# Altium PCB PCB1.PcbDoc (part 1 of 2)
Units mil, origin at the board's own origin, x right, y up, seen from the top; angles counter-clockwise.
Board outline 2900 x 2900 mil, 4 copper layers (Top Layer, Inner Layer, GND, Bottom Layer), stack 23.756 mil thick; 59 components, 117 nets, 456 pads, 163 vias.
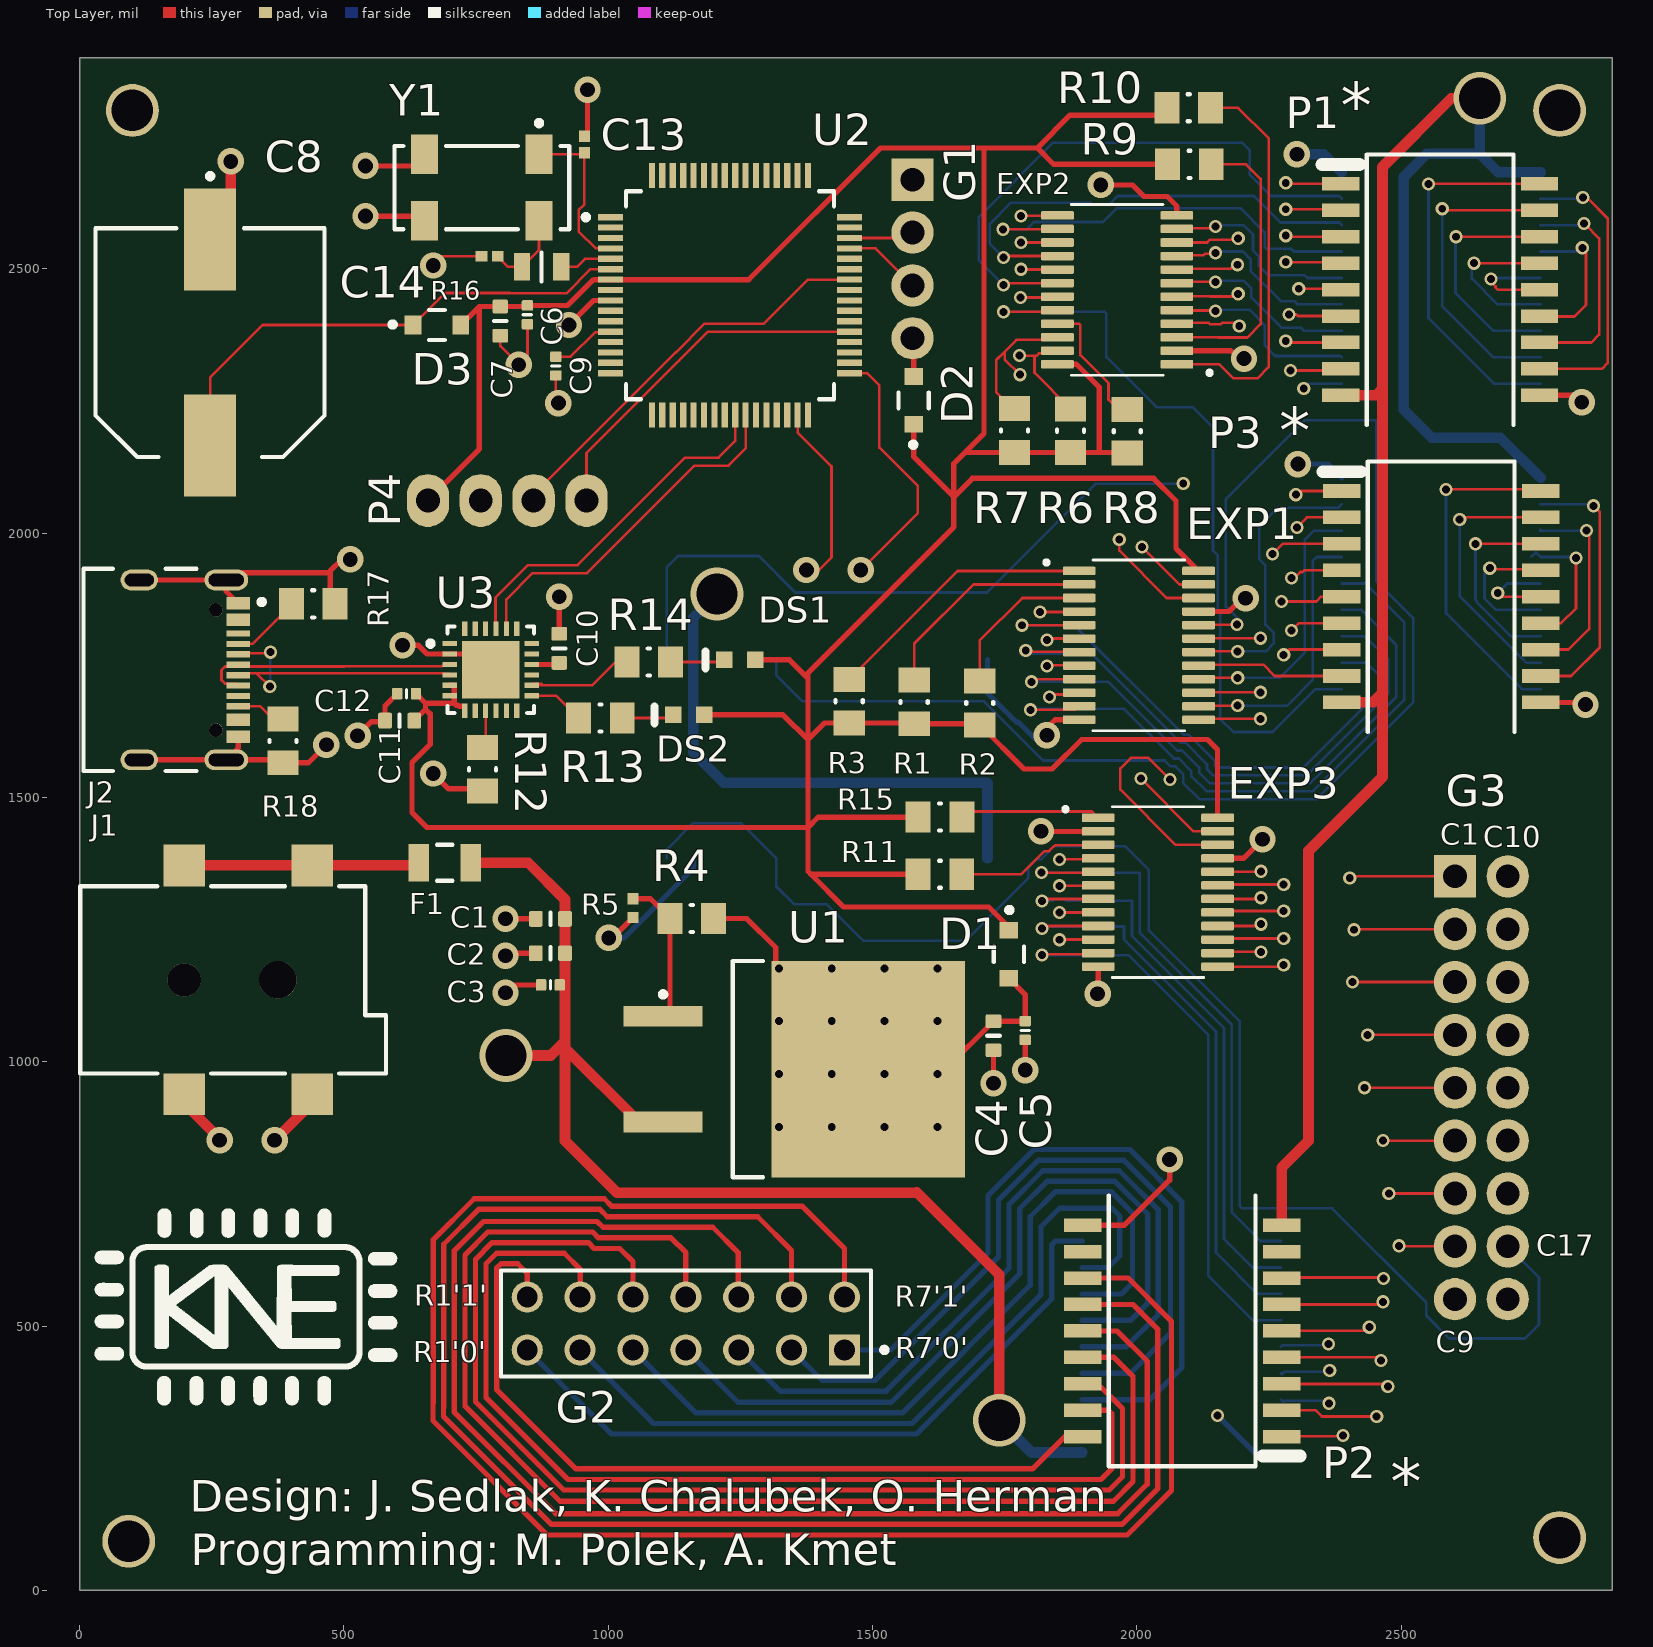
[diagram p0: Top Layer view]
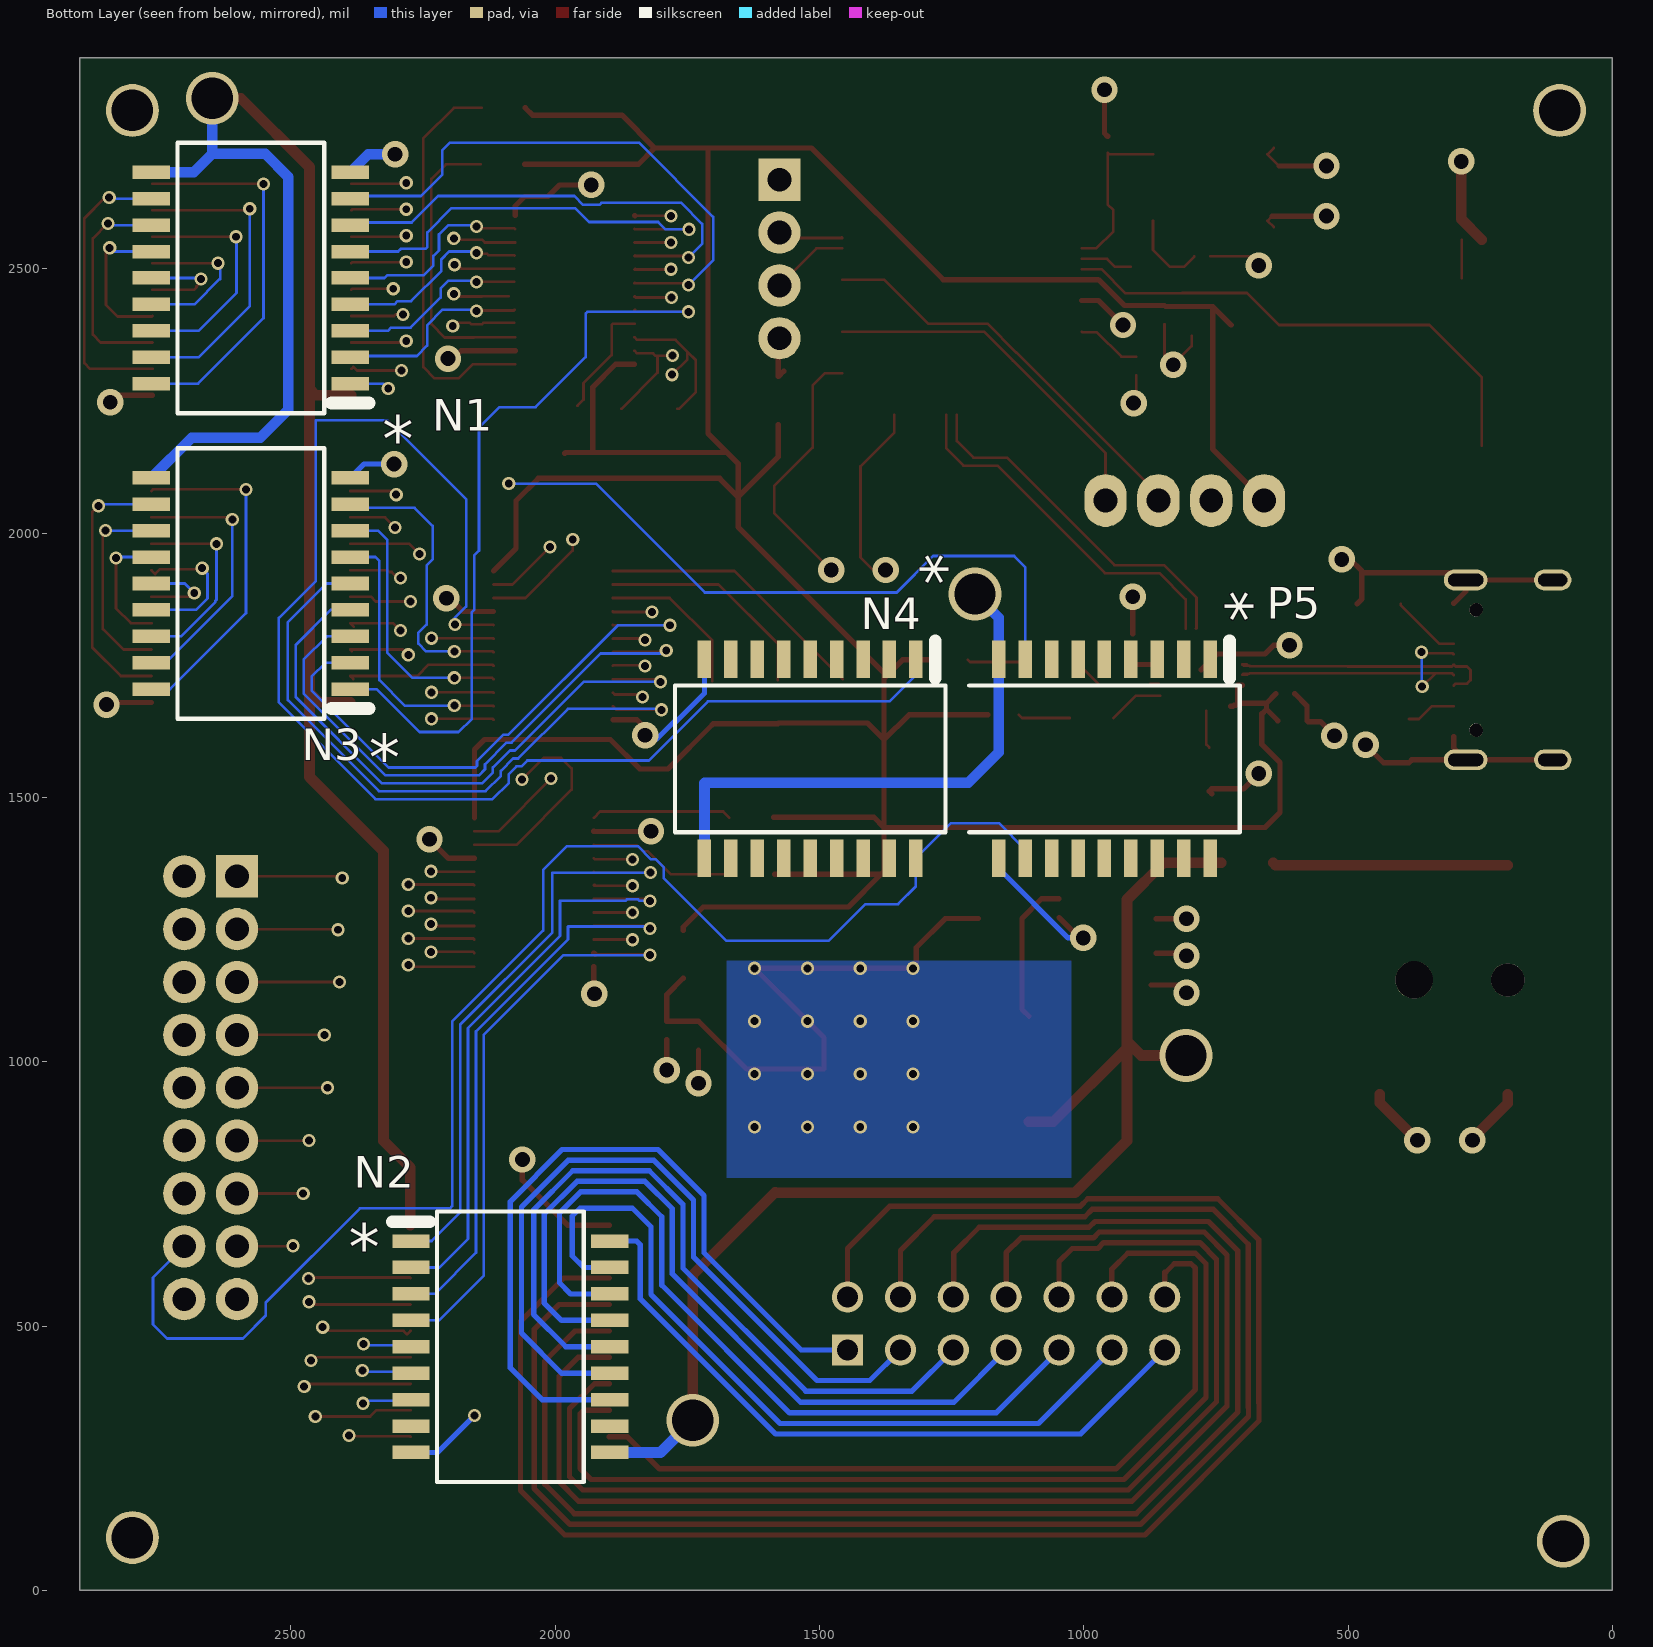
[diagram p1: Bottom Layer view, seen from below]
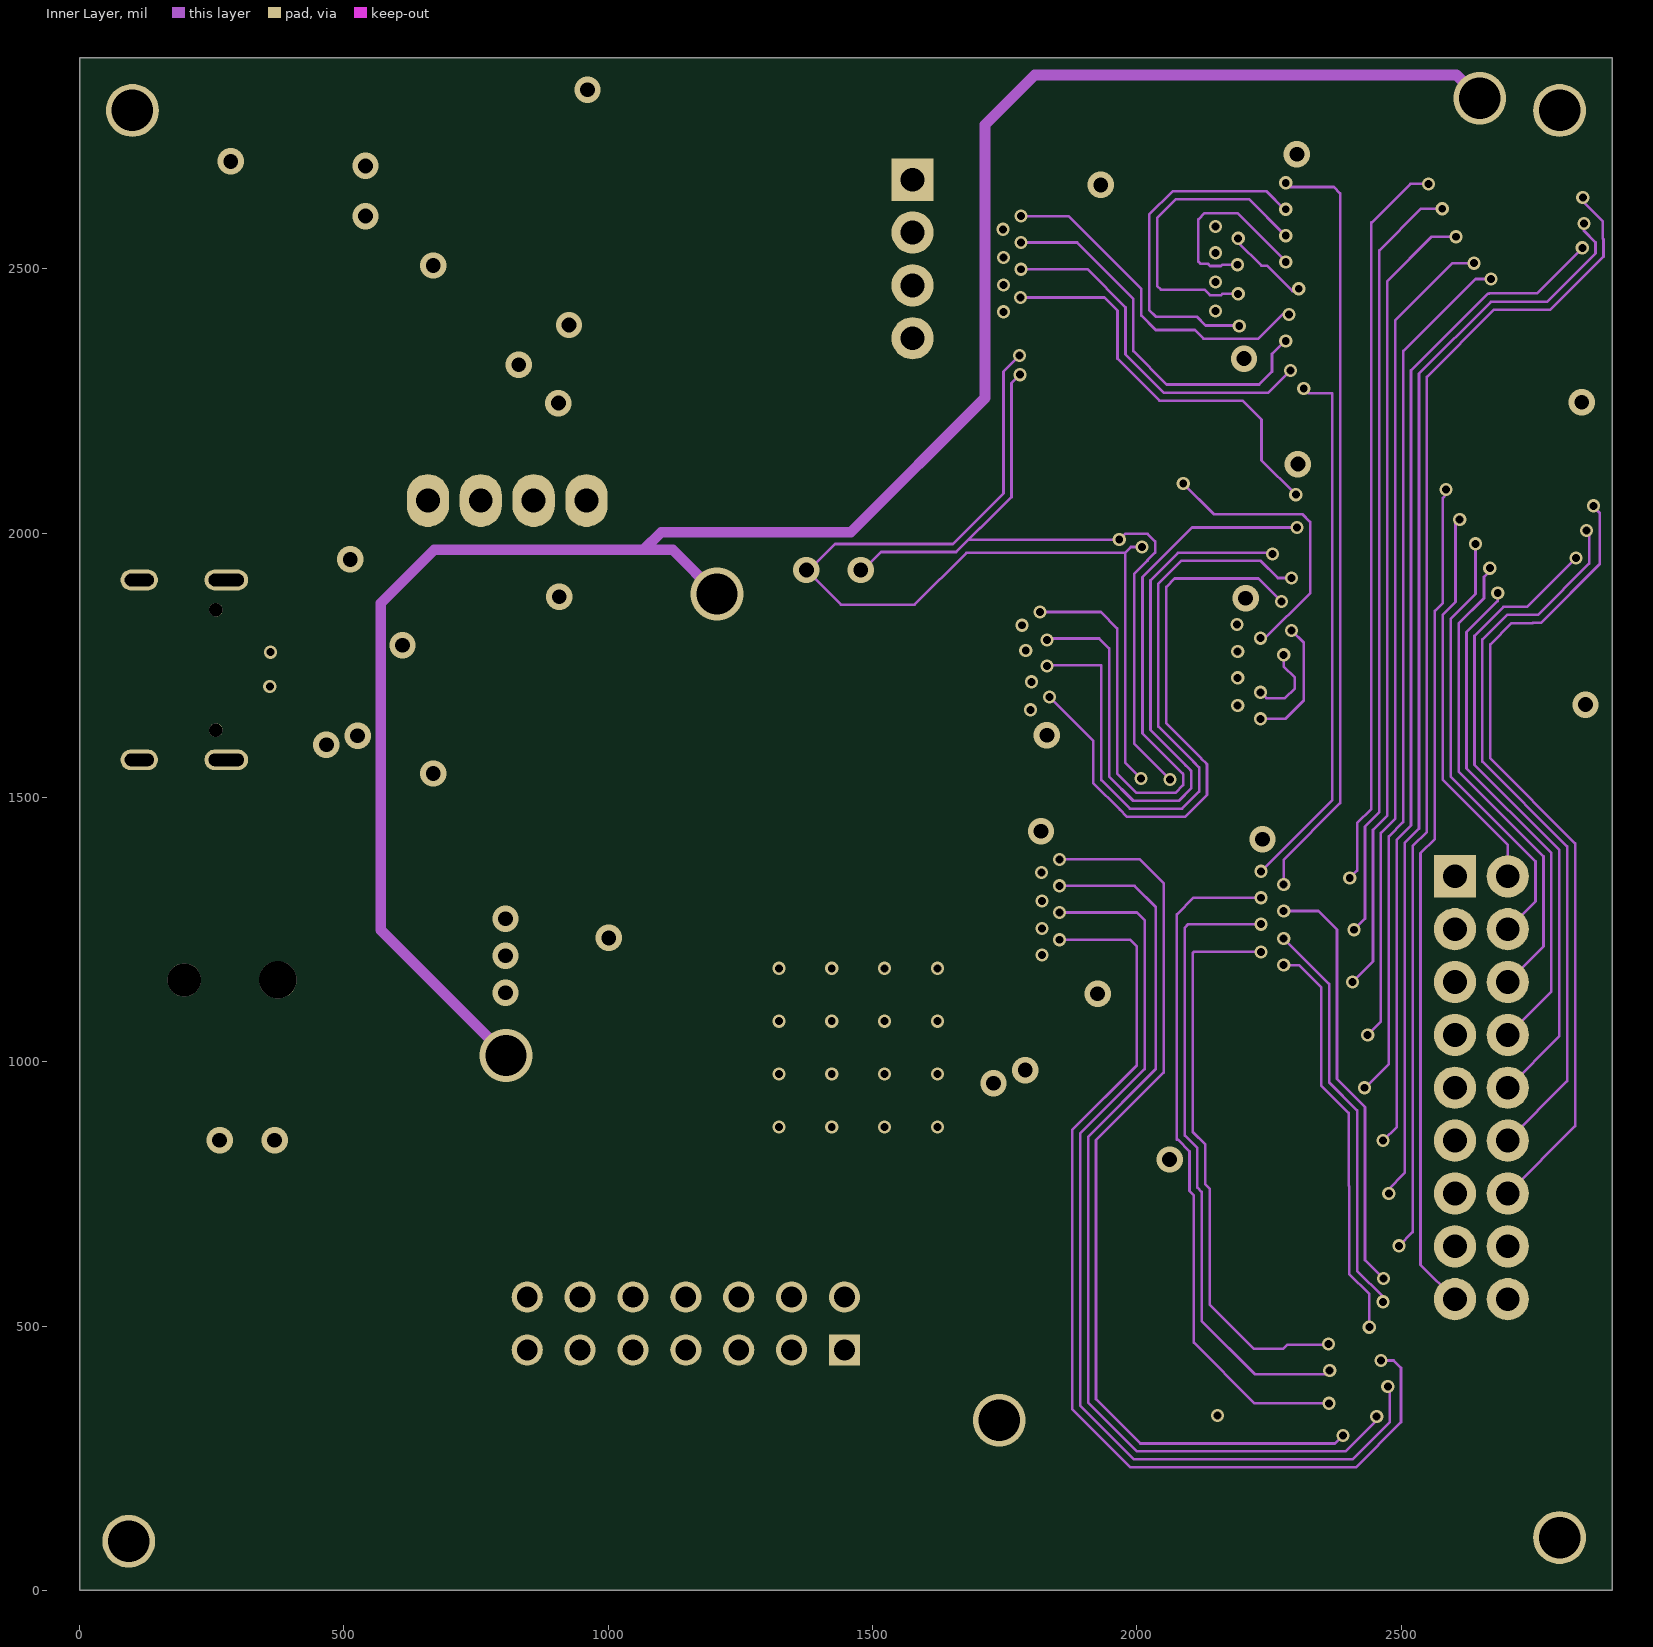
[diagram p2: Inner Layer]
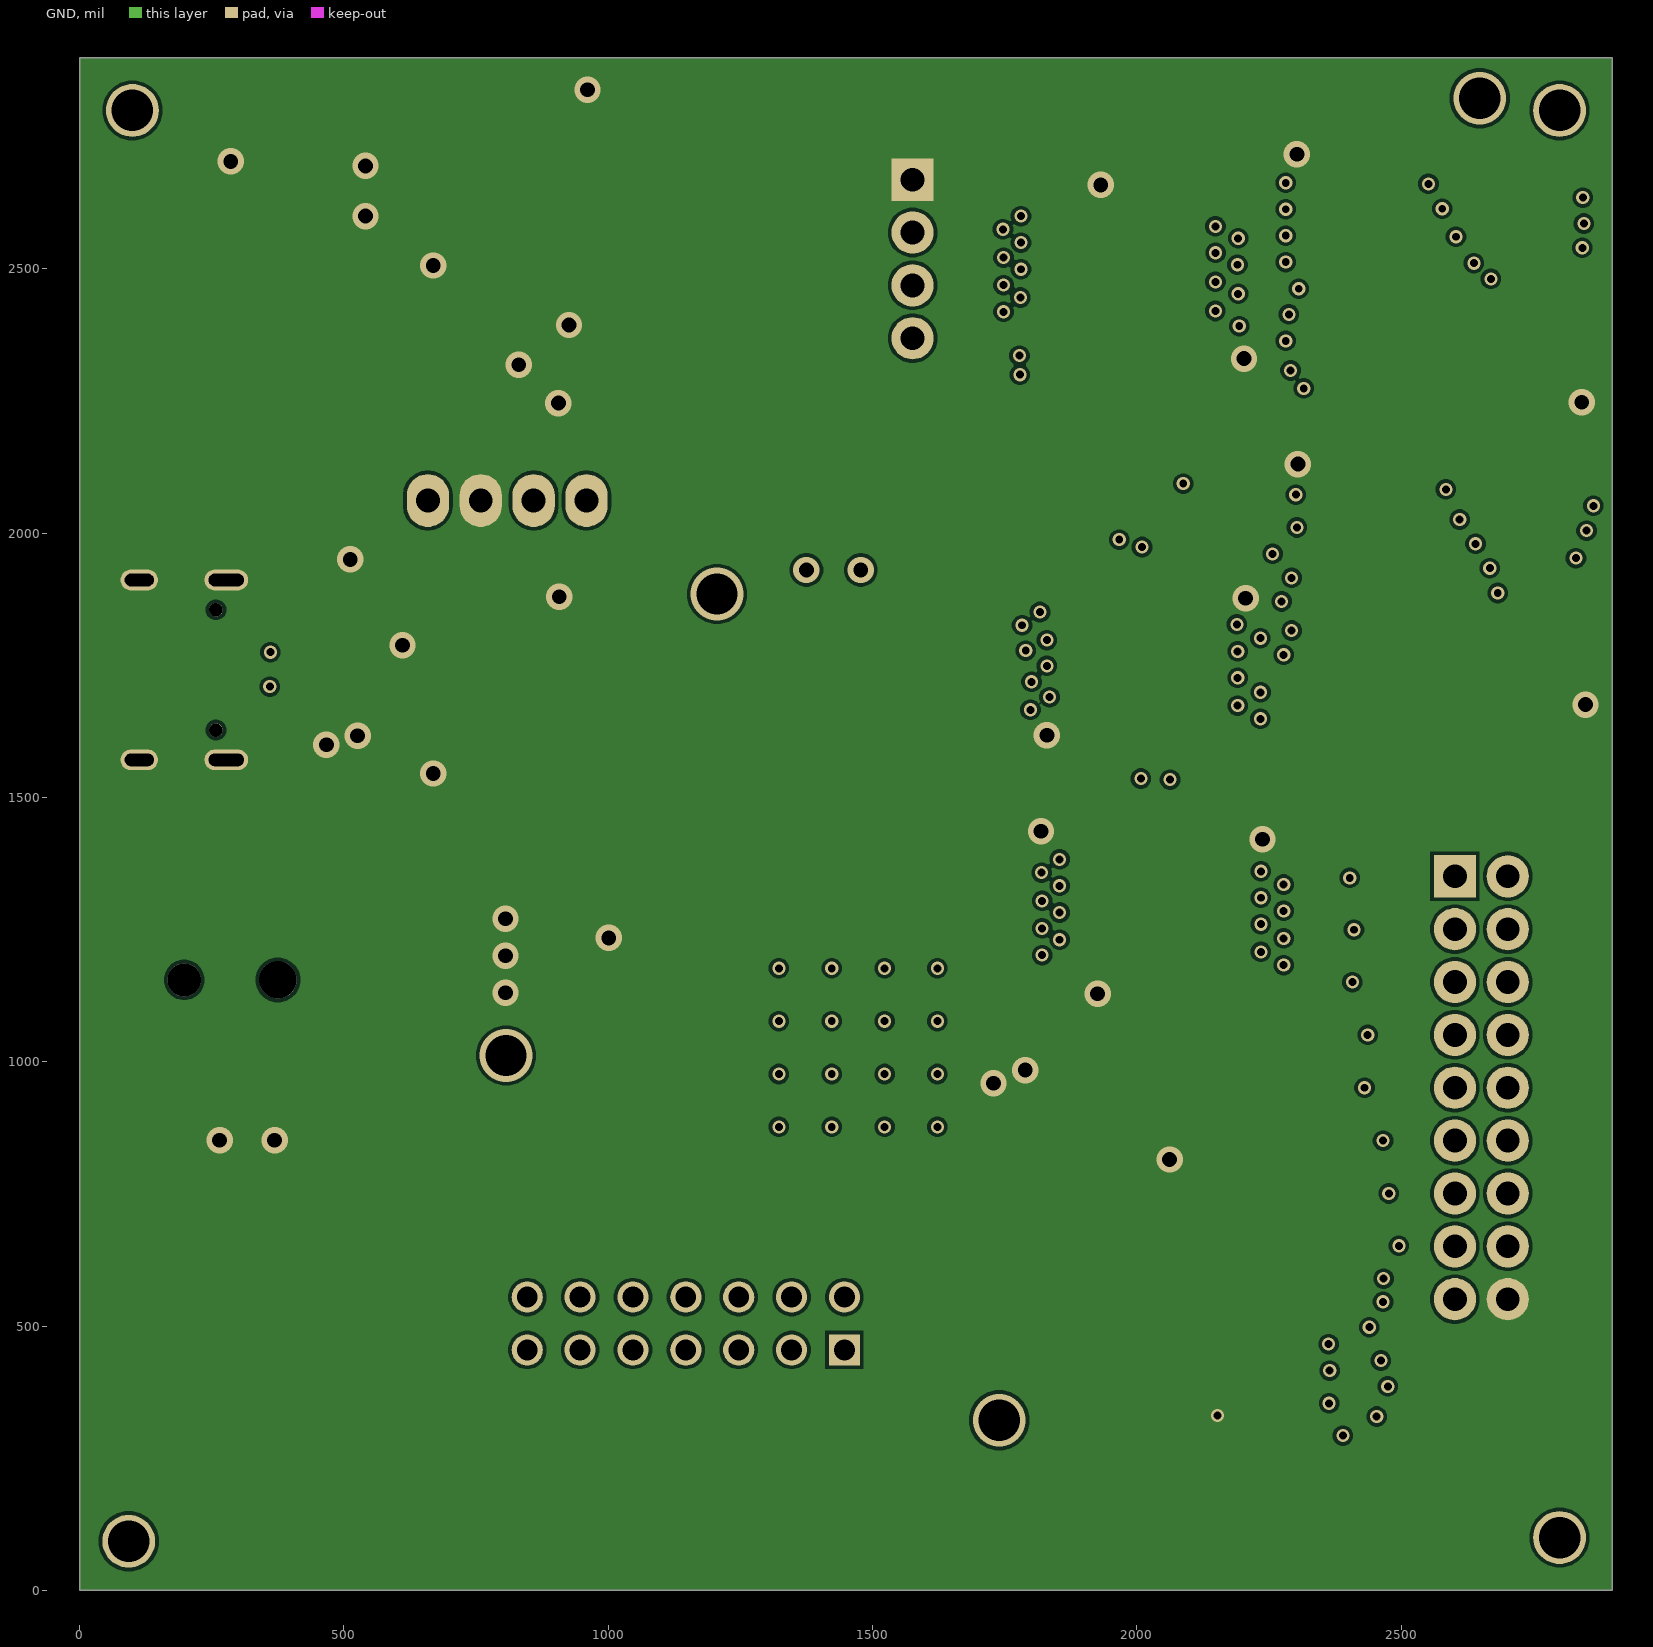
[diagram p3: GND]
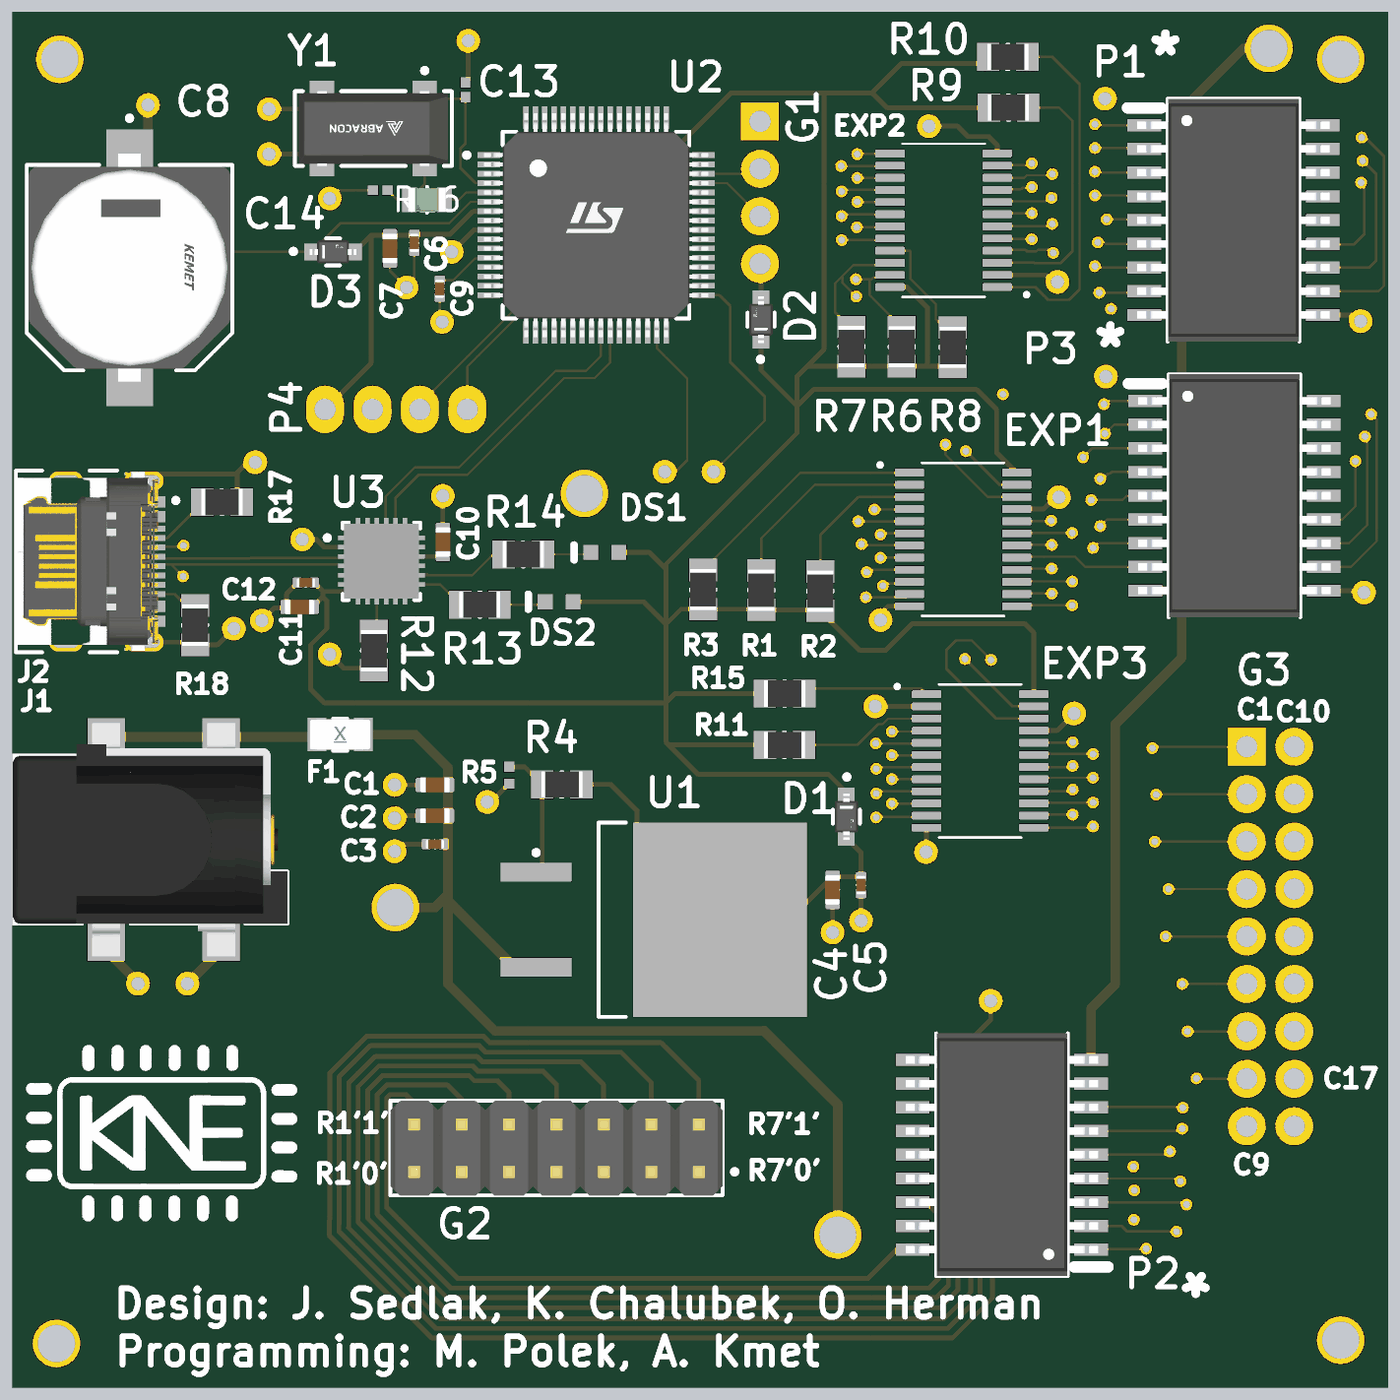
[diagram p5: 3D render of the assembled board from above, using the file's embedded part models]
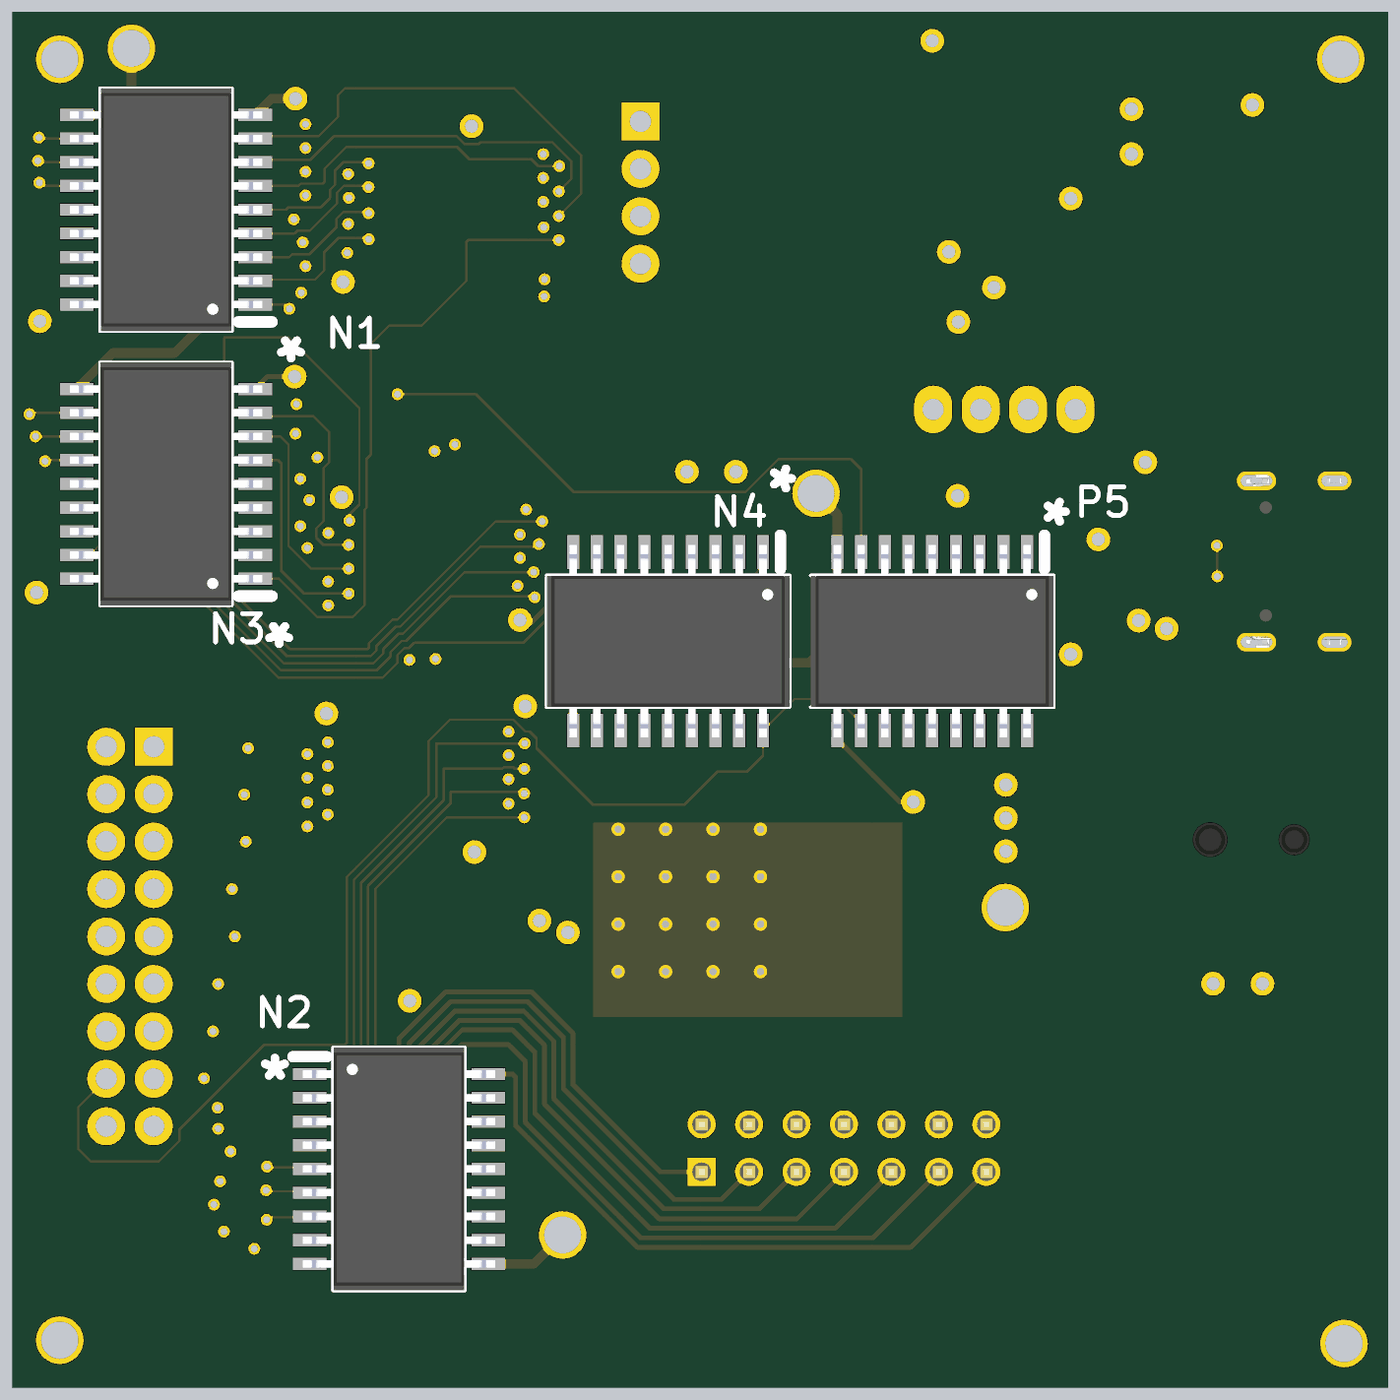
[diagram p6: 3D render of the assembled board from below, using the file's embedded part models]

## Layer stack, top to bottom
Top Solder: solder mask 0.4, Solder Resist, Dk 3.5
Top Layer: signal copper 1.4
Dielectric 2: prepreg 2.8, PP-006, Dk 4.1
Inner Layer: signal copper 1.378
Dielectric 1: dielectric 12.6, FR-4, Dk 4.8
GND: signal copper 1.378
Dielectric 3: prepreg 2.8, PP-006, Dk 4.1
Bottom Layer: signal copper 1.4
Bottom Solder: solder mask 0.4, Solder Resist, Dk 3.5

## Board outline
0,0 2900,0 2900,2900 0,2900

## Design rules (kind name [scope] priority, off if disabled: settings)
AssemblyTestPointUsage [All] p1: isadvanced=TRUE
AssemblyTestpoint [All] p1: isadvanced=TRUE testpointundercomponent=TRUE minsize=40 maxsize=100 preferedsize=60 minholesize=0 maxholesize=40 preferedholesize=32 testpointgrid=1 usegrid=TRUE gridtolerance=0.01 allowsidetop=TRUE allowsidebottom=TRUE
Clearance Clearance_1 [(ExistsOnLayer('Inner Layer') Or ExistsOnLayer('GND')) vs (ExistsOnLayer('Inner Layer') Or ExistsOnLayer('GND'))] p1: gap=6.5 ignorepadtopadclearanceinfootprint=FALSE sourcerule=40 cellrowname=All cellrowtype=0 cellcolname=All cellcoltype=0 innerlayers=TRUE
Clearance Clearance_2 [(ExistsOnLayer('Top Layer') Or ExistsOnLayer('Bottom Layer')) vs (ExistsOnLayer('Top Layer') Or ExistsOnLayer('Bottom Layer'))] p2: gap=6.5 ignorepadtopadclearanceinfootprint=FALSE sourcerule=40 cellrowname=All cellrowtype=0 cellcolname=All cellcoltype=0 outerlayers=TRUE
Clearance [All] p3: gap=10 ignorepadtopadclearanceinfootprint=FALSE ismatrix=TRUE
ComponentClearance [All] p1: isadvanced=TRUE gap=10 collisioncheckmode=3 verticalgap=10 showdistances=FALSE
DiffPairsRouting DifferentialPairsRouting_1 [InDifferentialPair('D_D')] p1: maxlimit=10 minlimit=8 mostfreqgap=8 toplayer_minwidth=5 toplayer_maxwidth=15 toplayer_prefwidth=5 midlayer1_minwidth=5 midlayer1_maxwidth=15 midlayer1_prefwidth=5 midlayer2_minwidth=5 midlayer2_maxwidth=15 midlayer2_prefwidth=5 bottomlayer_minwidth=5 bottomlayer_maxwidth=15 bottomlayer_prefwidth=5 maxuncoupledlength=500
DiffPairsRouting [All] p2: maxlimit=10 minlimit=10 mostfreqgap=10 toplayer_minwidth=15 toplayer_maxwidth=15 toplayer_prefwidth=15 midlayer1_minwidth=15 midlayer1_maxwidth=15 midlayer1_prefwidth=15 midlayer2_minwidth=15 midlayer2_maxwidth=15 midlayer2_prefwidth=15 bottomlayer_minwidth=15 bottomlayer_maxwidth=15 bottomlayer_prefwidth=15 maxuncoupledlength=500
FabricationTestPointUsage [All] p1: isadvanced=TRUE valid=0 allowmultiple=FALSE
FabricationTestpoint [All] p1: isadvanced=TRUE side=3 testpointundercomponent=TRUE minsize=40 maxsize=100 preferedsize=60 minholesize=0 maxholesize=40 preferedholesize=32 testpointgrid=1 allowsidetop=TRUE allowsidebottom=TRUE usegrid=TRUE gridtolerance=0.01
FanoutControl Fanout_BGA [IsBGA] p1: isadvanced=TRUE bgadir=Out bgaviamode=Centered fanoutstyle=Auto fanoutdirection=Alternating viagrid=1 // Fanout_BGA (Default Rule)
FanoutControl Fanout_LCC [IsLCC] p2: isadvanced=TRUE bgadir=Out bgaviamode=Centered fanoutstyle=Auto fanoutdirection=Alternating viagrid=1 // Fanout_LCC (Default Rule)
FanoutControl Fanout_SOIC [IsSOIC] p3: isadvanced=TRUE bgadir=Out bgaviamode=Centered fanoutstyle=Auto fanoutdirection=Alternating viagrid=1 // Fanout_SOIC (Default Rule)
FanoutControl Fanout_Small [(CompPinCount < 5)] p4: isadvanced=TRUE bgadir=Out bgaviamode=Centered fanoutstyle=Auto fanoutdirection=OutThenIn viagrid=1 // Fanout_Small (Default Rule)
FanoutControl Fanout_Default [All] p5: isadvanced=TRUE bgadir=Out bgaviamode=Centered fanoutstyle=Auto fanoutdirection=Alternating viagrid=1 // Fanout_Default (Default Rule)
Height [All] p1: isadvanced=TRUE minheight=0 maxheight=1000 prefheight=500
HoleSize [All] p1: isadvanced=TRUE absolutevalues=TRUE maxlimit=248.03 minlimit=5.91 maxpercent=80.000 minpercent=20.000
HoleToHoleClearance [All] p1: isadvanced=TRUE gap=17.72 allowstackedmicrovias=TRUE
LayerPairs [All] p1: isadvanced=TRUE enforce=TRUE
MaxMinImpedance MaxMinImpedance_1 [InDifferentialPair('D_D')] p1: minimum=85.00 maximum=95.00
MinimumSolderMaskSliver [All] p1: isadvanced=TRUE minsoldermaskwidth=3.94
NetAntennae [All] p1: isadvanced=TRUE netantennaetolerance=0
PasteMaskExpansion [All] p1: isadvanced=TRUE expansion=0
PlaneClearance [All] p1: isadvanced=TRUE clearance=20
PlaneConnect [All] p1: isadvanced=TRUE planeconnectstyle=Relief reliefexpansion=20 reliefentries=4 reliefconductorwidth=10 reliefairgap=10
PolygonConnect Direct [All] p1: isadvanced=TRUE connectstyle=Direct reliefconductorwidth=10 reliefentries=2 polygonreliefangle="0 Angle" airgapwidth=10
PolygonConnect PolygonConnectStyle_1 [InNet('RegOut')] p2: connectstyle=Direct reliefconductorwidth=10 reliefentries=4 polygonreliefangle="90 Angle" airgapwidth=10
PolygonConnect [All] p3: connectstyle=Relief reliefconductorwidth=10 reliefentries=4 polygonreliefangle="90 Angle" airgapwidth=10
RoutingCorners [All] p1: isadvanced=TRUE cornerstyle=45-Degree minsetback=100 maxsetback=100
RoutingPriority [All] p1: isadvanced=TRUE routingpriority=0
RoutingVias [All] p1: holewidth=28 width=50 viastyle="Through Hole" minholewidth=28 minwidth=50 maxholewidth=28 maxwidth=50
ShortCircuit [All] p1: isadvanced=TRUE allowed=FALSE
SilkToSilkClearance [All] p1: isadvanced=TRUE silktosilkclearance=5.91
SilkToSolderMaskClearance [IsPad] p1: isadvanced=TRUE minsilkscreentomaskgap=3.94 clearancetoexposedcopper=TRUE
SolderMaskExpansion [All] p1: isadvanced=TRUE expansion=1.5 istentingtop=FALSE
UnRoutedNet [All] p1: isadvanced=TRUE
UnpouredPolygon [All] p1: isadvanced=TRUE
Width "Schematic Width Constraint" [All] p1: maxlimit=20 minlimit=5 preferedwidth=10 midlayer1_prefwidth=5 midlayer2_prefwidth=5 minimp=50.000000 maximp=50.000000 favimp=50.000000
3 further rules are at their usual default settings.

## Classes and differential pairs
differential pair D_D: +D_P -D_N

## Components (designator, comment, footprint, x,y, rotation, side; value= is the part's Value field where it differs from the comment)
C1 "Capacitor 10µF +/-20% 10V 0603" CAPC0603(1608)100_L 890.8,1270.57 r180 top value=10µF
C2 "Capacitor 10µF +/-20% 10V 0603" CAPC0603(1608)100_L 890.8,1205.57 r180 top value=10µF
C3 "Capacitor 100nF +/-20% 50V 0402" CAPC0402(1005)60_L 890.8,1145.57 r180 top value=100nF
C4 "Capacitor 10µF +/-20% 10V 0603" CAPC0603(1608)100_L 1729,1049.36 r270 top value=10µF
C5 "Capacitor 100nF +/-20% 50V 0402" CAPC0402(1005)60_L 1789,1059.36 r270 top value=100nF
C6 "Capacitor 100nF +/-20% 10V 0402" CAPC0402(1005)60_L 847.34,2413.34 r90 top value=100nF
C7 "Capacitor 4.7µF +/-20% 10V 0603" CAPC0603(1608)100_L 796,2401.44 r90 top value=4.7µF
C8 "FC0V474ZFTBR24" FP-FC0V474ZFTBR24-MFG 247,2360.68 r270 top
C9 "Capacitor 100nF +/-20% 50V 0402" CAPC0402(1005)60_L 901,2316.28 r270 top value=100nF
C10 "Capacitor 4.7µF +/-20% 10V 0603" CAPC0603(1608)100_L 907.53,1782.32 r270 top value=4.7µF
C11 "Capacitor 4.7µF +/-20% 10V 0603" CAPC0603(1608)100_L 605.56,1645.57 r180 top value=4.7µF
C12 "Capacitor 100nF +/-20% 50V 0402" CAPC0402(1005)60_L 618.72,1696.57 r180 top value=100nF
C13 "GRM1555C1H5R0CA01D" CAPC1005X55X25LL05T10 955,2735.57 r270 top value=5pF
C14 "GRM1555C1H5R0CA01D" CAPC1005X55X25LL05T10 775.65,2524 r0 top value=5pF
D1 "1SS404,H3F" FP-SOD-323-MFG 1758,1203.57 r270 top
D2 "1SS404,H3F" FP-SOD-323-MFG 1578,2251.28 r90 top
D3 "1SS404,H3F" FP-SOD-323-MFG 676,2394 r0 top
DS1 "HSMH-C190" AVAG-HSMX-C190_V 1249,1760.57 r180 top
DS2 "HSMG-C190" AVAG-HSMX-C190_V 1152.53,1656.57 r180 top
EXP1 "TCA9539PWR" SOP65P640X120-24N 2004,1788 r0 top
EXP2 "TCA9539PWR" SOP65P640X120-24N 1963.01,2460.57 r180 top
EXP3 "TCA9539PWR" SOP65P640X120-24N 2040,1321 r0 top
F1 "0469005.WR" FP-0469-MFG 691,1376.57 r0 top
G1 "Goldpin 1x4" "Goldpin 1x4-Footprint-1"#1 1576,2669 r270 top
G2 "Goldpin 7x2 male kolumny 1-14" HRWN-M20-9980745_V 1147,505 r180 top
G3 "Goldpin 2x9" "Goldpin 2x9-Footprint-1" 2602,1351 r270 top
J1 "694108106102" 694108106102 270.83,1155.03 r270 top
J2 "USB4105-GF-A" FP-USB4105-GF-A-MFG 158.87,1741.49 r270 top
N1 "TBD62083AFG,EL" SOIC127P1030X245-18N 2575.99,2483 r0 bottom
N2 "TBD62083AFG,EL" SOIC127P1030X245-18N 2085,460.99 r180 bottom
N3 "TBD62083AFG,EL" SOIC127P1030X245-18N 2576,1905 r0 bottom
N4 "TBD62083AFG,EL" SOIC127P1030X245-18N 1517.76,1573.27 r270 bottom
P1 "TBD62783AFNG,EL" "New footprint 1" 2579,2481 r0 top
P2 "TBD62783AFNG,EL" "New footprint 1" 2081,471 r180 top
P3 "TBD62783AFNG,EL" "New footprint 1" 2580.99,1900 r0 top
P4 "Goldpin 1x4/To main controller" "Goldpin 1x4-Footprint-1"#2 659,2062 r0 top
P5 "TBD62783AFNG,EL" "New footprint 1" 941,1568.27 r270 bottom
R1 "Resistor 10k +/-1% 0805 125 mW" RESC2013X50X35ML15T15 1579,1681 r90 top value=10k
R2 "Resistor 10k +/-1% 0805 125 mW" RESC2013X50X35ML15T15 1703,1679 r90 top value=10k
R3 "Resistor 10k +/-1% 0805 125 mW" RESC2013X50X35ML15T15 1456,1682.34 r90 top value=10k
R4 "Resistor 10k +/-1% 0805 125 mW" RESC2013X50X35ML15T15 1158.34,1271.36 r0 top value=10k
R5 "ERJ-2RKF1962X" RESC1005X40X25NL05T05 1047,1290.85 r270 top value=19.6K
R6 "Resistor 10k +/-1% 0805 125 mW" RESC2013X50X35ML15T15 1874.83,2194.17 r90 top value=10k
R7 "Resistor 10k +/-1% 0805 125 mW" RESC2013X50X35ML15T15 1769,2194.34 r90 top value=10k
R8 "Resistor 10k +/-1% 0805 125 mW" RESC2013X50X35ML15T15 1982,2193 r90 top value=10k
R9 "Resistor 10k +/-1% 0805 125 mW" RESC2013X50X35ML15T15 2099.66,2698 r0 top value=10k
R10 "Resistor 10k +/-1% 0805 125 mW" RESC2013X50X35ML15T15 2098.34,2805 r180 top value=10k
R11 "Resistor 10k +/-1% 0805 125 mW" RESC2013X50X35ML15T15 1627.66,1355 r0 top value=10k
R12 "Resistor 10k +/-1% 0805 125 mW" RESC2013X50X35ML15T15 762.53,1553.42 r90 top value=10k
R13 "Resistor 10k +/-1% 0805 125 mW" RESC2013X50X35ML15T15 985.34,1650.57 r180 top value=100
R14 "Resistor 10k +/-1% 0805 125 mW" RESC2013X50X35ML15T15 1077,1756.57 r180 top value=150
R15 "Resistor 10k +/-1% 0805 125 mW" RESC2013X50X35ML15T15 1628,1463 r180 top value=10k
R16 "PNM0805E5002BST5" FP-PNM0805-MFG 874,2504 r180 top
R17 "Resistor 10k +/-1% 0805 125 mW" RESC2013X50X35ML15T15 442,1866.57 r180 top value=5.1k
R18 "Resistor 10k +/-1% 0805 125 mW" RESC2013X50X35ML15T15 385,1607.23 r90 top value=5.1k
U1 "LM317D2T-TR" TO-263_N 1352,986.36 r0 top
U2 "STM32G070RBT6" FP-LQFP64-5W-MFG 1230.53,2450.38 r0 top
U3 "CP2104-F03-GM" FP-CP2104-F03-GM-MFG 778,1742 r0 top
Y1 "ABS25-32.768KHZ-T" FP-ABS25-MFG 761,2654 r180 top

## Footprints (in the part's own frame and the unit in brackets; to place one, negate y for a bottom-side part, rotate by r counter-clockwise, add the part's x,y. Pads: shape width x height; smd on the part's side, far side on the other; paste and mask are expansions set on the pad)
694108106102 [mm] "DC Power Jack Right Angled SMT ?6.4 with 4 soldering pads & pegs"
  rect 2x2 smd: 1(-5.5,4.3) 1(-5.5,-1.85) 2(5.5,-1.85) 3(5.5,4.3)
  round 1.6 hole 1.6 unplated: MH1(0,-1.85)
  round 1.8 hole 1.8 unplated: MH2(0,2.65)
  silkscreen extent -4.5,-6.85 4.5,7.85, body extent -6.25,-6.85 6.25,7.85, height 11.05
AVAG-HSMX-C190_V [mm] "SMD, 2-Leads, Body 1.6x0.8mm, Height 0.9mm"
  rect 0.8x0.8 smd: 1(-0.75,0) 2(0.75,0)
  silkscreen extent 1.65,-0.4 1.65,0.4, body extent -0.8,-0.4 0.8,0.4, height 0.9
CAPC0402(1005)60_L [mm] "Chip Capacitor, Body 1.0x0.5mm, Height 0.6mm, IPC High Density"
  rrect25% 0.5x0.55 smd: 1(-0.45,0) 2(0.45,0)
  silkscreen extent 0,-0.2 0,0.2, body extent -0.5,-0.25 0.5,0.25, height 0.6
CAPC0603(1608)100_L [mm] "Chip Capacitor, Body 1.6x0.8mm, Height 1.0mm, IPC High Density"
  rrect25% 0.66x0.76 smd: 1(-0.7,0) 2(0.7,0)
  silkscreen extent 0,-0.3 0,0.3, body extent -0.8,-0.4 0.8,0.4, height 0.95
CAPC1005X55X25LL05T10 [mm] "Chip Capacitor, 2-Leads, Body 1.00x0.50mm, IPC High Density"
  rect 0.56x0.52 smd: 1(-0.39,0) 2(0.39,0)
  body extent -0.53,-0.28 0.53,0.28, height 0.55
FP-0469-MFG [mm]
  rect 1x1.8 smd paste+0 mask+0: 1(-1.25,0) 2(1.25,0)
  silkscreen extent -0.38,-0.86 0.38,0.86, body extent -1.85,-1 1.85,1, height 0.25
FP-ABS25-MFG [mm]
  rect 1.3x1.9 smd paste+0 mask+0: 1(-2.75,-1.6) 2(2.75,-1.6) 3(2.75,1.6) 4(-2.75,1.6)
  silkscreen extent -4.2,-3.22 4.2,2, body extent -4.3,-2.65 4.3,2.65, height 0.25
FP-CP2104-F03-GM-MFG [mm]
  rect 0.7x0.25 smd paste+0 mask+0: 1(-1.975,1.25) 2(-1.975,0.75) 3(-1.975,0.25) 4(-1.975,-0.25) 5(-1.975,-0.75) 6(-1.975,-1.25) 13(1.975,-1.25) 14(1.975,-0.75) 15(1.975,-0.25) 16(1.975,0.25) 17(1.975,0.75) 18(1.975,1.25)
  rect 0.25x0.7 smd paste+0 mask+0: 7(-1.25,-1.975) 8(-0.75,-1.975) 9(-0.25,-1.975) 10(0.25,-1.975) 11(0.75,-1.975) 12(1.25,-1.975) 19(1.25,1.975) 20(0.75,1.975) 21(0.25,1.975) 22(-0.25,1.975) 23(-0.75,1.975) 24(-1.25,1.975)
  rect 2.75x2.75 smd paste-1000 mask+0: 25(0,0)
  silkscreen extent -3.02,-2.07 2.08,2.07, body extent -2.42,-2.42 2.43,2.42, height 0.25
FP-FC0V474ZFTBR24-MFG [mm]
  rect 4.9x2.5 smd paste+0 mask+0: 1(-4.95,0) 2(4.95,0)
  silkscreen extent -8.12,-5.5 5.5,5.5, body extent -7.65,-5.75 7.65,5.75, height 0.25
FP-LQFP64-5W-MFG [mm]
  rect 1.2x0.3 smd paste+0 mask+0: 1(-5.75,3.75) 2(-5.75,3.25) 3(-5.75,2.75) 4(-5.75,2.25) 5(-5.75,1.75) 6(-5.75,1.25) 7(-5.75,0.75) 8(-5.75,0.25) 9(-5.75,-0.25) 10(-5.75,-0.75) 11(-5.75,-1.25) 12(-5.75,-1.75) 13(-5.75,-2.25) 14(-5.75,-2.75) 15(-5.75,-3.25) 16(-5.75,-3.75) 33(5.75,-3.75) 34(5.75,-3.25) 35(5.75,-2.75) 36(5.75,-2.25) 37(5.75,-1.75) 38(5.75,-1.25) 39(5.75,-0.75) 40(5.75,-0.25) 41(5.75,0.25) 42(5.75,0.75) 43(5.75,1.25) 44(5.75,1.75) 45(5.75,2.25) 46(5.75,2.75) 47(5.75,3.25) 48(5.75,3.75)
  rect 0.3x1.2 smd paste+0 mask+0: 17(-3.75,-5.75) 18(-3.25,-5.75) 19(-2.75,-5.75) 20(-2.25,-5.75) 21(-1.75,-5.75) 22(-1.25,-5.75) 23(-0.75,-5.75) 24(-0.25,-5.75) 25(0.25,-5.75) 26(0.75,-5.75) 27(1.25,-5.75) 28(1.75,-5.75) 29(2.25,-5.75) 30(2.75,-5.75) 31(3.25,-5.75) 32(3.75,-5.75) 49(3.75,5.75) 50(3.25,5.75) 51(2.75,5.75) 52(2.25,5.75) 53(1.75,5.75) 54(1.25,5.75) 55(0.75,5.75) 56(0.25,5.75) 57(-0.25,5.75) 58(-0.75,5.75) 59(-1.25,5.75) 60(-1.75,5.75) 61(-2.25,5.75) 62(-2.75,5.75) 63(-3.25,5.75) 64(-3.75,5.75)
  silkscreen extent -7.05,-5 5,5, body extent -6.45,-6.45 6.45,6.45, height 0.25
FP-PNM0805-MFG [mil]
  rect 31x52 smd paste+0 mask+0: 1(-37,0) 2(37,0)
  silkscreen extent 0,-27 0,27, body extent -56,-31 56,31, height 10
FP-SOD-323-MFG [mm]
  rect 0.8x0.9 smd paste+0 mask+0: 1(-1.15,0) 2(1.15,0)
  silkscreen extent -2.25,-0.72 0.38,0.72, body extent -1.65,-0.82 1.65,0.82, height 0.25
FP-USB4105-GF-A-MFG [mm]
  rrect100% 1x2.1 hole 1.7 slot 0.6 at 0 deg paste-2539.97 mask+0: 1(-4.32,3.015) 2(4.32,3.015)
  rrect100% 1x1.8 hole 1.4 slot 0.6 at 0 deg paste-2539.97 mask+0: 3(-4.32,-1.165) 4(4.32,-1.165)
  rect 0.6x1.15 smd paste+0 mask+0: A1-B12(-3.2,3.59) A4-B9(-2.4,3.59) B1-A12(3.2,3.59) B4-A9(2.4,3.59)
  rect 0.3x1.15 smd paste+0 mask+0: A5(-1.25,3.59) A6(-0.25,3.59) A7(0.25,3.59) A8(1.25,3.59) B5(1.75,3.59) B6(0.75,3.59) B7(-0.75,3.59) B8(-1.75,3.59)
  round 0.65 hole 0.65 unplated paste-2539.97 mask+0: ""(-2.89,2.515) ""(2.89,2.515)
  silkscreen extent -4.86,-3.84 4.86,4.84, body extent -4.96,-3.94 4.96,4.27, height 0.25
"Goldpin 1x4-Footprint-1"#1 [mil]
  rect 80x80 hole 45: 1(0,0)
  round 80 hole 45: 2(100,0) 3(200,0) 4(300,0)
"Goldpin 1x4-Footprint-1"#2 [mil]
  oval 80x100 hole 45: 1(0,0) 2(100,0) 3(200,0) 4(300,0)
"Goldpin 2x9-Footprint-1" [mil]
  rect 80x80 hole 45: 1(0,0)
  round 80 hole 45: 2(100,0) 3(200,0) 4(300,0) 5(400,0) 6(500,0) 7(600,0) 8(700,0) 9(800,0) 10(0,100) 11(100,100) 12(200,100) 13(300,100) 14(400,100) 15(500,100) 16(600,100) 17(700,100) 18(800,100)
HRWN-M20-9980745_V [mm] "THD, 14-Leads, Body 17.78x5.08mm, Pitch 2.54mm"
  rect 1.5x1.5 hole 1: 1(-7.62,1.27)
  round 1.5 hole 1: 2(-7.62,-1.27) 3(-5.08,1.27) 4(-5.08,-1.27) 5(-2.54,1.27) 6(-2.54,-1.27) 7(0,1.27) 8(0,-1.27) 9(2.54,1.27) 10(2.54,-1.27) 11(5.08,1.27) 12(5.08,-1.27) 13(7.62,1.27) 14(7.62,-1.27)
  silkscreen extent -9.67,-2.54 8.89,2.54, body extent -8.89,-2.53 8.89,2.55, height 8.64
"New footprint 1" [mm]
  rect 1.8x0.65 smd: 1(-4.902,4.572) 2(-4.902,3.302) 3(-4.902,2.032) 4(-4.902,0.762) 5(-4.902,-0.508) 6(-4.902,-1.778) 7(-4.902,-3.048) 8(-4.902,-4.318) 9(-4.902,-5.588) 10(4.648,-5.588) 11(4.648,-4.318) 12(4.648,-3.048) 13(4.648,-1.778) 14(4.648,-0.508) 15(4.648,0.762) 16(4.648,2.032) 17(4.648,3.302) 18(4.648,4.572)
  silkscreen extent -5.8,-7.01 3.4,5.99, body extent -5.28,-7.01 5.02,5.99, height 2.45
RESC1005X40X25NL05T05 [mm] "Chip Resistor, 2-Leads, Body 1.00x0.50mm, IPC Medium Density"
  rect 0.55x0.55 smd: 1(-0.45,0) 2(0.45,0)
  body extent -0.53,-0.27 0.53,0.28, height 0.4
RESC2013X50X35ML15T15 [mm] "Chip Resistor, 2-Leads, Body 2.2x1.4mm, IPC Low Density"
  rect 1.2x1.5 smd: 1(-1.05,0) 2(1.05,0)
  silkscreen extent -0.05,-0.65 0.05,0.65, body extent -1.1,-0.7 1.1,0.7, height 0.5
SOIC127P1030X245-18N [mm]
  rect 1.8x0.65 smd: 1(-4.775,5.08) 2(-4.775,3.81) 3(-4.775,2.54) 4(-4.775,1.27) 5(-4.775,0) 6(-4.775,-1.27) 7(-4.775,-2.54) 8(-4.775,-3.81) 9(-4.775,-5.08) 10(4.775,-5.08) 11(4.775,-3.81) 12(4.775,-2.54) 13(4.775,-1.27) 14(4.775,0) 15(4.775,1.27) 16(4.775,2.54) 17(4.775,3.81) 18(4.775,5.08)
  silkscreen extent -5.68,-6.5 3.52,6.5, body extent -5.15,-6.5 5.15,6.5, height 2.45
SOP65P640X120-24N [mm]
  rrect25% 1.57x0.41 smd: 1(-2.87,3.575) 2(-2.87,2.925) 3(-2.87,2.275) 4(-2.87,1.625) 5(-2.87,0.975) 6(-2.87,0.325) 7(-2.87,-0.325) 8(-2.87,-0.975) 9(-2.87,-1.625) 10(-2.87,-2.275) 11(-2.87,-2.925) 12(-2.87,-3.575) 13(2.87,-3.575) 14(2.87,-2.925) 15(2.87,-2.275) 16(2.87,-1.625) 17(2.87,-0.975) 18(2.87,-0.325) 19(2.87,0.325) 20(2.87,0.975) 21(2.87,1.625) 22(2.87,2.275) 23(2.87,2.925) 24(2.87,3.575)
  silkscreen extent -4.54,-4.1 2.2,4.1, body extent -3.07,-3.94 3.33,3.86, height 1.2
TO-263_N [mm] "D2-PAK, 4-Leads, Body 9.2x10.2mm, Pitch 2.54mm, Lead Span 15.4mm, IPC Medium Density"
  rect 3.8x1 smd: 1(-6.3,2.54) 3(-6.3,-2.54)
  rect 9.3x10.4 smd: 4(3.55,0)
  silkscreen extent -6.42,-5.2 -1.5,5.2, body extent -2.95,-5.2 6.4,5.2, height 4.6

## Part data
C1 C2 C4: library part CMP-001-00075-4, "Chip Capacitor, 10µF +/-20%, 10V, 0603, Thickness 1 mm", Case/Package=0603, Max Operating Temperature=85°C, Min Operating Temperature=-55°C, Tolerance=10%, Voltage Rating=10V, Mounting Technology=SMT, Pins=2
C3 C5 C9 C12: library part CMP-001-00067-3, "Chip Capacitor, 100nF +/-20%, 50V, 0402, Thickness 0.6 mm", Case/Package=0402, Max Operating Temperature=85°C, Min Operating Temperature=-55°C, Tolerance=10%, Voltage Rating=50V, Mounting Technology=SMT, Pins=2
C6: library part CMP-001-00061-3, "Chip Capacitor, 100nF +/-20%, 10V, 0402, Thickness 0.6 mm", Case/Package=0402, Max Operating Temperature=85°C, Min Operating Temperature=-55°C, Tolerance=20%, Voltage Rating=10V, Mounting Technology=SMT, Pins=2
C7 C10 C11: library part CMP-001-00076-4, "Chip Capacitor, 4.7µF +/-20%, 10V, 0603, Thickness 1 mm", Case/Package=0603, Max Operating Temperature=85°C, Min Operating Temperature=-55°C, Tolerance=10%, Voltage Rating=10V, Mounting Technology=SMT, Pins=2
C8: library part CMP-03024-000007-1, "CAP 470mF -20% +80% 3.5V SMD", Capacitance=470mF, Case/Package=Radial, ESR (Equivalent Series Resistance)=25R, Leakage Current=420uA, Max Operating Temperature=70°C, Min Operating Temperature=-25°C, Package Quantity=500, Tolerance=80%, Voltage=3.5V, Contact Plating=Tin, Depth=8.5mm, Diameter=10.5mm, Height=8.5mm, Height - Seated (Max)=0.335inch, Lead Pitch=5mm, Length=10.8mm, Mount="Surface Mount", Packaging="Tape and Reel", Radiation Hardening=No, REACH SVHC="No SVHC", RoHS Compliant=Yes, Termination=SMD/SMT, Voltage Rating=3.5V, Voltage Rating (DC)=3.5V, Width=10.8mm
C13 C14: library part CMP-2008-04391-1, Manufacturer=Murata, Part Number=GRM1555C1H5R0CA01D
D1 D2 D3: library part CMP-35905-000002-1, "DIODE SCHOTTKY 20V 300MA USC", Average Rectified Current=300mA, Case/Package=SOD, Max Operating Temperature=100°C, Max Repetitive Reverse Voltage (Vrrm)=25V, Max Reverse Voltage (DC)=20V, Min Operating Temperature=-40°C, Contact Plating=Tin, Element Configuration=Single, Forward Current=300mA, Mount="Surface Mount", Packaging="Tape and Reel"
DS1: library part CMP-007-00014-2, "LED Uni-Color Red, 65 mW, 20 mA, -40 to 85 degC, 2-Pin SMD, RoHS, Tape and Reel", Case/Package=0603, Colour=Red, Forward Current=20mA, Forward Voltage=1.8V, Manufacturer=Avago, Max Operating Temperature=85°C, Min Operating Temperature=-40°C, Package Description="2-Pin Surface Mount Device, Body 1.6 x 0.8 mm, Height 0.9 mm", Package Quantity=4000, Package Reference=HSMX-C190, Power=78mW, Datasheet URL=http://docs.avagotech.com/docs/AV02-0551EN, Datasheet Version=Mar-12, Illumination Colour=Red, Lens Style=Diffused, Luminous Intensity=17mcd, Manufacturer URL=http://www.avagotech.com/, Mounting Technology=SM, Nominal Vf=1.8V, Packaging=TapeandReel, Pins=2, RoHS Compliant=True, Viewing Angle=170degrees
DS2: library part CMP-007-00013-2, "LED Uni-Color Green, 52 mW, 20 mA, -40 to 85 degC, 2-Pin SMD, RoHS, Tape and Reel", Case/Package=0603, Colour=Green, Forward Current=20mA, Forward Voltage=2.2V, Manufacturer=Avago, Max Operating Temperature=85°C, Min Operating Temperature=-40°C, Package Description="2-Pin Surface Mount Device, Body 1.6 x 0.8 mm, Height 0.9 mm", Package Quantity=4000, Package Reference=HSMX-C190, Power=52mW, Datasheet URL=http://docs.avagotech.com/docs/AV02-0551EN, Datasheet Version=Mar-12, Illumination Colour=Green, Lens Style=Diffused, Luminous Intensity=15mcd, Manufacturer URL=http://www.avagotech.com/, Mounting Technology=SM, Nominal Vf=2.2V, Packaging=TapeandReel, Pins=2, RoHS Compliant=True, Viewing Angle=170degrees
EXP1 EXP2 EXP3: library part CMP-012-000001-2, "Remote 16-Bit I2C and SMBus Low-Power I/O Expander w/ Interrupt Output, Reset, and Config Registers 24-TSSOP -40 to 85", Package="TSSOP-24 Texas Instruments", Availability=Unavailable, Component Type=Standard, Design Item ID=TCA9539PWR, MF="Texas Instruments", MP=TCA9539PWR, Pin Count=24, Price=None, SnapEDA_Link=https://www.snapeda.com/parts/TCA9539PWR/Texas%20Instruments/view-part/557437/?ref=snap, Source=TCA9539PWR.SchLib, Texas_Instruments-Purchase-URL=https://snapeda.com/shop?store=Texas+Instruments&id=557437
F1: library part CMP-08605-000100-1, "FUSE BOARD MOUNT 5A 32VDC 1206", Case Code (Imperial)=1206, Case Code (Metric)=3216, Current Rating=5A, DC Cold Resistance=35mR, Max Operating Temperature=150°C, Min Operating Temperature=-55°C, Package Quantity=3000, Power Dissipation=1.08W, Resistor Type=Ceramic, Voltage Rating=32V, Approvals=UL, Blow Characteristic="TIME DELAY", Body Material=Ceramic, Case/Package=1206, Depth=1.63mm, Fuse Current=5A, Fuse Type="Board Mount (Cartridge Style Excluded)", Height=0.9mm, Housing Material=Ceramic, Lead Free="Lead Free", Length=3.27mm, Mount="Surface Mount", Number of Pins=2, Packaging="Tape and Reel", Radiation Hardening=No, Resistance=35mR, RoHS Compliant=Yes, Series=469, Size=0.9mm, Terminal Material=Nickel, Termination=SMD/SMT, Voltage Rating (DC)=32V, Width=1.63mm, Working Voltage=32V
G1: library part CMP-002-00078-3, "Goldpin, connector, 1 row 4 pin"
G2: library part CMP-002-00076-1, "2 - kolumna 1 EXP1 / 4 - kolumna 2 / 6 - kolumna 3 / 8 - kolumna 4 / ... etc / 1 - kolumna 8 / 3 - kolumna 9", Connector Type="BOARD CONNECTOR", Mounting Technology=Board, RoHS Compliant=Yes
G3: library part CMP-002-00079-1, "Goldpin, connector, 2 row 9 pin"
J1: library part CMP-1502-00180-2, Color=Black, Current Rating=5A, Flammability Rating="UL94 V-0", Insulation Resistance=100MΩ, Max Operating Temperature=85°C, Min Operating Temperature=-40°C, Operating Supply Voltage=24V, Connector Type=Power, Contact Gender=Female, Contact Plating=Tin, Gender=Male, Housing Material=Polyamide, Mount="Surface Mount", NexarPartId=52645186, Packaging="Tape and Reel", REACH SVHC=Unknown, RoHS=Compliant, Shielding=Unshielded, Termination=SMD/SMT, Voltage Rating=24V, Voltage Rating (DC)=24V
J2: library part CMP-245163-000001-1, "CONN RCPT USB2.0 TYPEC 5A", Current Rating=5/6.25/1.25/0.25A, Manufacturer=GCT, Package=0, Temperature="-40°C to +85°C", Temperature Range High=+85°C, Temperature Range Low=-40°C, Voltage Rating=20V, Automotive=No, Category=Conn, ComponentLink2Description=Datasheet, ComponentLink2URL=https://gct.co/files/drawings/usb4105.pdf, Conn Orientation="Right Angle", Contact Material=Gold,Nickel, Device Class L1=Connectors, Device Class L2="USB Connectors", Device Class L3=unset, Digikey Description="CONN RCPT USB2.0 TYPEC 5A", Height=3.46mm, Is Female=yes, Lead Free=Yes, Manufacturer Part Number=USB4105-GF-A, Number Of Contacts=16, Octopart=https://octopart.com/usb4105-gf-a-gct-106627878, RoHS=TRUE, Usb Standard="USB 2.0"
N1: library part CMP-011-00013-3, "Power Switch/Driver 1:1 N-Channel 500mA 18-SOP / Buffer/Inverter Based Peripheral Driver, 8 Driver, 0.4A, BCD, PDSO18 / ****************************************TUTAJ*************************************** / 1 -  / 2 - PA1 - kolumna 10 \"0\" / 3 -  / 4 - PA3 kolumna 11 \"0\" / 5 -  / 6 - PA5 kolumna 12 \"0 / 7 -  / 8 - PA7 kolumna 13 \"0\"", Case/Package="SOIC-18 Toshiba Semiconductor and Storage", Check_prices=https://www.snapeda.com/parts/TBD62083AFG,EL/Toshiba+Semiconductor+and+Storage/view-part/?ref=eda, Component Type=Standard, Design Item ID=TBD62083AFG,EL, MF="Toshiba Semiconductor", MP=TBD62083AFG,EL, Pins=18, SnapEDA_Link=https://www.snapeda.com/parts/TBD62083AFG,EL/Toshiba+Semiconductor+and+Storage/view-part/?ref=snap, Source=TBD62083AFG,EL.SchLib
N2 N3 N4: library part CMP-011-00013-3, "Power Switch/Driver 1:1 N-Channel 500mA 18-SOP", Case/Package="SOIC-18 Toshiba Semiconductor and Storage", Check_prices=https://www.snapeda.com/parts/TBD62083AFG,EL/Toshiba+Semiconductor+and+Storage/view-part/?ref=eda, Component Type=Standard, Design Item ID=TBD62083AFG,EL, MF="Toshiba Semiconductor", MP=TBD62083AFG,EL, Pins=18, SnapEDA_Link=https://www.snapeda.com/parts/TBD62083AFG,EL/Toshiba+Semiconductor+and+Storage/view-part/?ref=snap, Source=TBD62083AFG,EL.SchLib
P1: library part CMP-006-00021-2, "Buffer/Inverter Based Peripheral Driver, 8 Driver, 0.4A, BCD, PDSO18 / ****************************************TUTAJ*************************************** / 1 -  / 2 -  / 3 -  / 4 -  / 5 -  / 6 -  / 7 -  / 8 -"
P2 P3 P5: library part CMP-006-00021-2, "Buffer/Inverter Based Peripheral Driver, 8 Driver, 0.4A, BCD, PDSO18"
P4: library part CMP-002-00078-2, "Goldpin, connector, 1 row 4 pin"
R1 R2 R3 R4 R6 R7 R8 R9 R10 R11 R12 R13 R14 R15 R17 R18: library part CMP-009-00018-5, "Chip Resistor, 10 KOhm, +/- 1%, 125 mW, -55 to 155 degC, 0805 (2012 Metric)", Case/Package=0805, Max Operating Temperature=155°C, Min Operating Temperature=-55°C, Power=125mW, Tolerance=1%, Voltage Rating=150V, Mounting Technology=SM, Pins=2, RoHS Compliant=True
R5: library part CMP-1011-00654-2, Manufacturer=Panasonic, Part Number=ERJ-2RKF1962X
R16: library part CMP-02407-012955-1, "RES SMD 50K OHM 0.1% 1/5W 0805 / //0 R aby był footprint i wytłumić raczej nieprawdopodobne wyższe harmoniczne", Case Code (Imperial)=0805, Case Code (Metric)=2012, Max Operating Temperature=155°C, Max Power Dissipation=200mW, Min Operating Temperature=-55°C, Resistance=0R, Resistance Tolerance=0.1%, Resistor Type="Thin Film", Temperature Coefficient=25ppm/°C, Voltage Rating=100V, Case/Package=0805, Features="Moisture Resistant", Height=0.015inch, Length=0.08inch, Number of Terminations=2, Packaging="Tape and Reel", Power Rating=200mW, RoHS Compliant=Yes, Series=PNM, Termination=SMD/SMT, Tolerance=0.1%, Voltage Rating (DC)=100V, Width=0.05inch
U1: library part CMP-0244-00094-1, "1.5A, 1.2V to 37V Adjustable Voltage Regulator, 3-Pin D2PAK, Tape and Reel", ComponentLink1Description="Manufacturer URL", ComponentLink1URL=http://www.st.com, ComponentLink2Description=Datasheet, ComponentLink2URL=http://www.st.com/internet/com/TECHNICAL_RESOURCES/TECHNICAL_LITERATURE/DATASHEET/CD00000455.pdf, DatasheetVersion=1/11/2011, PackageDescription="3-Pin Transistor Outline Package 2.54 mm Pitch, 15.4 mm Lead Span (D2PAK)", PackageReference=TO-263, PackageVersion=2011
U2: library part CMP-12105-000143-1, "IC MCU 32BIT 128KB FLASH 64LQFP", RoHS Compliant=Yes
U3: library part CMP-0511-00004-2, "IC SGL USB-TO-UART BRIDGE 24QFN", Case/Package=QFN, Max Operating Temperature=85°C, Max Supply Voltage=3.6V, Min Operating Temperature=-40°C, Min Supply Voltage=3V, Operating Supply Current=17mA, Operating Supply Voltage=3.3V, Contact Plating=Tin, Data Rate=2Mbps, Number of Channels=1, Number of Pins=24, Number of Transceivers=1, Packaging=Rail/Tube, Radiation Hardening=No, Weight=0.001764oz
Y1: library part CMP-2000-05037-2, "CRYSTAL 32.7680KHZ 12.5PF SMD", Case/Package=SMD/SMT, ESR (Equivalent Series Resistance)=50kR, Frequency=32.768kHz, Frequency Tolerance=20ppm, Load Capacitance=12.5pF, Max Operating Temperature=85°C, Min Operating Temperature=-40°C, Operating Frequency="32.768 kHz", Package Quantity=1000, Depth=3.8mm, Height=0.098inch, Lead Free="Lead Free", Length=8mm, Mount="Surface Mount", Number of Pins=4, Packaging="Tape and Reel", Radiation Hardening=No, REACH SVHC="No SVHC", RoHS Compliant=Yes, Series=ABS25, Series Resistance=50kR, Termination=SMD/SMT, Tolerance=20ppm, Width=3.8mm

## Free pads (board coordinates)
  round 100 hole 78.74: M1(93,93) M1(100,2800) M1(2800,100) M1(2800,2800)

## Via types
v1: diameter 25, hole 15, Top Layer to Bottom Layer, 123 vias
v2: diameter 50, hole 28, Top Layer to Bottom Layer, 36 vias
v3: diameter 100, hole 78, Top Layer to Bottom Layer, 4 vias

## Nets (pads, with @x,y where several pads share a name; then routed paths per layer and width w, separated by ;. In a path a pad name is that pad's centre, name@x,y a point inside that pad or via, vN(x,y) a via of type N, cw(c..) or ccw(c..) an arc to the next point about the centre after c; other vN are vias at no path point)
3.3V: C6.2 C7.2 C11.1 C12.1 D1.1 D2.1 D3.2 DS1.1 DS2.1 EXP1.24 EXP2.24 EXP3.24 P4.1 R1.1 R2.1 R3.1 R6.1 R7.1 R8.1 R9.1 R10.2 R11.1 R15.2 U2.7 U3.5 U3.6 U3.7 | length 8292
  Top Layer w5: C6.2@845.28,2429 C6.2@847.34,2431.06
  Top Layer w10: C11.1@633.12,1645.57 654.58,1667.03 ; C12.1@636.43,1696.57 654.58,1678.42 ; P4.1@659,2062 756.28,2159.28 756.28,2429 ; U3.5@700.24,1712.47 708.87,1712.47 U3.6@708.87,1695.44 ; U3.6@708.87,1692.79 708.87,1678.42 ; D3.2@721.28,2394 756.28,2429 ; 722.53,1672.87 717.65,1672.87 715.76,1674.76 712.53,1674.76 708.87,1678.42 ; C6.2@845.28,2429 C7.2@796,2429 756.28,2429 ; C6.2@847.34,2431.06 923.06,2431.06 971,2479 972.19,2479 973.09,2479.91 U2.7@1004.15,2479.91 1266,2479.91 1515.09,2729 1711,2729 ; DS2.1@1182.06,1656.57 1331,1656.57 1378,1609.57 ; DS1.1@1278.52,1760.56 1343,1760.56 1378,1725.57 ; D2.1@1578,2206 1578,2145 1654,2069 ; R11.1@1584.66,1355 1383.57,1355 ; R15.2@1586.66,1463 1397.43,1463 1378,1443.57 ; D1.1@1758,1248.84 1758,1255 1720,1293 1445.57,1293 1383.57,1355 ; EXP2.24@1850.02,2319.82 1885.85,2319.82 1929,2276.67 1929,2154 1927.83,2152.83 ; R8.1@1982,2151.66 1980.83,2152.83 1927.83,2152.83 ; R10.2@2057,2805 2043,2791 1874,2791 1812,2729 ; R9.1@2058.32,2698 1843,2698 1812,2729 ; EXP1.24@2116.99,1928.75 2074.5,1971.24 2074.5,2061.5 2032,2104 1689,2104 1654,2069 ; EXP3.24@2152.99,1461.75 2152.99,1591.01 2134,1610 1896,1610 1840,1554 1786.66,1554 R2.1@1703,1637.66 1701,1639.66 R1.1@1579,1639.66 1577.66,1641 R3.1@1456,1641 1409.43,1641 1378,1609.57 ; 654.58,1667.03 654.58,1678.42 ; 654.58,1667.03 663.29,1658.32 663.29,1600.36 629,1566.07 629,1471.57 657,1443.57 1378,1443.57 ; 654.58,1678.42 708.87,1678.42 ; 1378,1443.57 1378,1609.57 ; 1378,1443.57 1378,1360.57 1383.57,1355 ; 1378,1609.57 1378,1725.57 ; 1378,1725.57 1378,1735.93 1654,2011.93 1654,2069 ; 1654,2069 1654,2132 1675,2153 ; 1675,2153 1711,2189 1711,2729 ; 1675,2153 R7.1@1769,2153 1874.66,2153 R6.1@1874.83,2152.83 1927.83,2152.83 ; 1711,2729 1812,2729
12V: C1.1 C2.1 C3.1 F1.2 N1.10 N2.10 N3.10 N4.10 P1.9 P2.9 P3.9 P5.9 U1.3 | length 11033.8
  Top Layer w20: F1.2@740.21,1376.57 849,1376.57 918.35,1307.21 C1.1@918.35,1270.57 C2.1@918.35,1205.57 918.35,1039.21 ; v3(807,1012) 891.14,1012 918.35,1039.21 ; U1.3@1103.97,886.36 1057.99,886.36 918.35,1026 ; v3(1740,322) 1740,597 1584,753 1583,752 1017,752 918.35,850.65 918.35,1026 ; P2.9@2273.99,691 2273.99,800 2325,851.01 2325,1399 2465,1539 2465,1698 ; P1.9@2386.01,2261 2453,2261 2465,2273 ; P3.9@2388,1680 2447,1680 2465,1698 ; v3(2649,2823) 2595,2823 2465,2693 2465,2273 ; 918.35,1026 918.35,1039.21 ; 2465,1698 2465,2273
  Inner Layer w20: v3(807,1012) 569.5,1249.5 569.5,1867.5 671,1969 1067,1969 ; v3(1206,1885) 1122,1969 1067,1969 ; v3(2649,2823) 2605,2867 1807,2867 1713,2773 1713,2256 1459.14,2002.14 1100.14,2002.14 1067,1969
  Bottom Layer w20: v3(1206,1885) 1161,1840 P5.9@1161,1761.26 1161,1586 1219,1528 1717,1528 1717.76,1527.24 N4.10@1717.76,1385.28 ; v3(1740,322) 1801.01,260.99 N2.10@1897.01,260.99 ; v3(2649,2823) 2649,2718 ; N3.10@2763.99,2105 2687.99,2181 2558,2181 2505,2234 2505,2674 2549,2718 2649,2718 ; N1.10@2763.98,2683 2684,2683 2649,2718
"Column 1": G3.1 N1.18 P1.18 | length 2322.8
  Top Layer w5: v1(2403,1348) 2406,1351 G3.1@2602,1351 ; v1(2552,2661) P1.18@2761.99,2661
  Inner Layer w5: v1(2403,1348) 2417,1362 2417,1451.49 2444,1478.49 2444,2588 2445,2588 2518,2661 v1(2552,2661)
  Bottom Layer w5: v1(2552,2661) 2552,2407 2676,2283 N1.18@2763.98,2283
"Column 1 \"0\"": EXP3.20 N1.1 | length 1176.3
  Top Layer w5: EXP3.20@2152.99,1359.39 2233.89,1359.39 v1(2235,1360.5)
  Inner Layer w5: v1(2235,1360.5) 2370,1495.5 2370,2265 2325,2265 v1(2316,2274)
  Bottom Layer w5: v1(2316,2274) 2325,2283 N1.1@2388,2283
"Column 1 \"1\"": EXP3.19 P1.1 | length 1693.7
  Top Layer w5: EXP3.19@2152.99,1333.8 2154.7,1335.5 v1(2278,1335.5) ; v1(2282,2663) 2284,2661 P1.1@2386.01,2661
  Inner Layer w5: v1(2278,1335.5) 2278,1382.29 2385,1489.29 2385,2643 2373,2655 2290,2655 v1(2282,2663)
"Column 2": G3.2 N1.17 P1.17 | length 2243.4
  Top Layer w5: v1(2411,1250) 2412,1251 G3.2@2602,1251 ; v1(2578,2614) 2581,2611 P1.17@2761.99,2611
  Inner Layer w5: v1(2411,1250) 2432,1271 2432,1445.28 2459,1472.28 2459,2535 2538,2614 v1(2578,2614)
  Bottom Layer w5: v1(2578,2614) 2578,2430 2675,2333 N1.17@2763.98,2333
"Column 2 \"0\"": EXP2.5 N1.2 | length 373
  Top Layer w5: EXP2.5@2076.89,2423.07 2078.58,2421.37 2148.06,2421.37 v1(2148.86,2420.57)
  Bottom Layer w5: v1(2148.86,2420.57) 2151.36,2423.07 2212.93,2423.07 2242.5,2393.5 2242.5,2355 2262,2335.5 2385.5,2335.5 N1.2@2388,2333
"Column 2 \"1\"": EXP2.4 P1.2 | length 879.9
  Top Layer w5: EXP2.4@2077.48,2398.07 2136.01,2398.07 2138.51,2395.57 2159.22,2395.57 2161.72,2398.07 2187.93,2398.07 v1(2194,2392) ; v1(2282,2613) 2384.01,2613 P1.2@2386.01,2611
  Inner Layer w5: v1(2194,2392) 2192.93,2393.07 2130.21,2393.07 2113.64,2409.64 2036.36,2409.64 2023.69,2422.31 2023.69,2602.69 2068,2647 2246,2647 2280,2613 v1(2282,2613)
"Column 3": G3.3 N1.16 P1.16 | length 2165.9
  Top Layer w5: v1(2408,1151) G3.3@2602,1151 ; v1(2604,2561) P1.16@2761.99,2561
  Inner Layer w5: v1(2408,1151) 2447,1190 2447,1439.07 2474,1466.07 2474,2477 2558,2561 v1(2604,2561)
  Bottom Layer w5: v1@2603,2560 2603,2455 2675,2383 N1.16@2763.98,2383
"Column 3 \"0\"": EXP2.7 N1.3 | length 360.4
  Top Layer w5: EXP2.7@2078.2,2475.57 v1(2149.01,2475.57)
  Bottom Layer w5: v1(2149.01,2475.57) 2151.51,2478.07 2202.36,2478.07 2217.01,2463.42 2217.01,2446.03 2274.04,2389 2310.5,2389 2316.5,2383 N1.3@2388,2383
"Column 3 \"1\"": EXP2.6 P1.3 | length 788
  Top Layer w5: EXP2.6@2087.8,2448.57 2138.32,2448.57 2138.82,2448.07 2187.01,2448.07 v1(2192.01,2453.07) ; v1(2282,2563) 2284,2561 P1.3@2386.01,2561
  Inner Layer w5: v1(2192.01,2453.07) 2161.86,2453.07 2159.36,2450.57 2138.65,2450.57 2128.22,2461 2045.69,2461 2038.69,2468 2038.69,2596.47 2074.21,2632 2212,2632 2281,2563 v1(2282,2563)
"Column 4": G3.4 N1.15 P1.15 | length 2037.8
  Top Layer w5: v1(2437,1051) G3.4@2602,1051 ; v1@2637,2510 v1(2638,2511) P1.15@2761.99,2511
  Inner Layer w5: v1(2437,1051) 2462,1076 2462,1432.85 2489,1459.85 2489,2403 2597,2511 v1(2638,2511)
  Bottom Layer w5: v1@2637,2510 2634,2507 2634,2481 2635,2481 2683,2433 N1.15@2763.98,2433
"Column 4 \"0\"": EXP2.9 N1.4 | length 368.7
  Top Layer w5: EXP2.9@2077.02,2525.57 2077.76,2526.31 2126.68,2526.31 2129.18,2528.81 2147.41,2528.81 v1(2149.18,2530.57)
  Bottom Layer w5: v1(2149.18,2530.57) 2151.68,2533.07 2200.97,2533.07 2215.62,2518.42 2215.62,2496.03 2272.64,2439 2298.36,2439 2304.36,2433 N1.4@2388,2433
"Column 4 \"1\"": EXP2.8 P1.4 | length 588
  Top Layer w5: EXP2.8@2077.61,2500.57 2177.7,2500.57 2185.2,2508.07 v1(2190.62,2508.07) ; v1(2282,2513) 2384.01,2513 P1.4@2386.01,2511
  Inner Layer w5: v1(2190.62,2508.07) 2162.03,2508.07 2159.53,2505.57 2138.82,2505.57 2134.47,2509.92 2121.08,2509.92 2116.73,2514.27 2116.73,2593.7 2128.6,2605.57 2190.43,2605.57 2282,2514 v1(2282,2513)
"Column 5": G3.5 N1.14 P1.14 | length 2017.4
  Top Layer w5: v1(2431,951) G3.5@2602,951 ; v1(2670.18,2481.18) 2670.18,2475.77 2678.87,2467.07 2678.87,2465.13 2683,2461 P1.14@2761.99,2461
  Inner Layer w5: v1(2431,951) 2432,951 2477,996 2477,1426.64 2504,1453.64 2504,2345 2504.82,2345 2641,2481.18 v1(2670.18,2481.18)
  Bottom Layer w5: v1(2670.18,2481.18) 2672,2483 N1.14@2763.98,2483
"Column 5 \"0\"": EXP2.11 N1.5 | length 384.5
  Top Layer w5: EXP2.11@2076.16,2575.57 2077.49,2576.9 2145.34,2576.9 v1(2149.01,2580.57)
  Bottom Layer w5: v1(2149.01,2580.57) 2151.51,2583.07 2202.36,2583.07 2220,2565.43 2220,2535.25 2230.62,2524.64 2230.62,2506.92 2249.54,2488 2318,2488 2323,2483 N1.5@2388,2483
"Column 5 \"1\"": EXP2.10 P1.5 | length 363.5
  Top Layer w5: EXP2.10@2076,2550.13 2133.39,2550.13 2138.82,2555.57 2189.51,2555.57 v1(2192.01,2558.07) ; v1(2306.61,2462.6) 2384.41,2462.6 P1.5@2386.01,2461
  Inner Layer w5: v1(2192.01,2558.07) 2192.01,2550.57 2236.21,2506.37 2246.13,2506.37 2294.5,2458 2305,2458 2305,2460.99 v1(2306.61,2462.6)
"Column 6": G3.6 N1.13 P1.13 | length 2328.5
  Top Layer w5: v1(2466,851) G3.6@2602,851 ; P1.13@2761.99,2411 2762.99,2410 2828,2410 2850,2432 2850,2533 v1(2843,2540)
  Inner Layer w5: v1(2466,851) 2492,877 2492,1420.43 2519,1447.43 2519,2308.21 2663.79,2453 2666,2453 2667,2454 2757,2454 v1(2843,2540)
  Bottom Layer w5: N1.13@2763.98,2533 2841,2533 2843,2535 v1(2843,2540)
"Column 6 \"0\"": EXP2.14 N1.6 | length 810.9
  Top Layer w5: v1(1747,2575) 1849.29,2575 EXP2.14@1850.02,2575.72
  Bottom Layer w5: v1(1747,2575) 1791.36,2575 1805.36,2589 1936.25,2589 1962.25,2615 2196,2615 2242,2569 2242,2541.53 2245.53,2538 2292.36,2538 2297.36,2533 N1.6@2388,2533